# EAGLE board x-OSC Gloves_v2 (EAGLE 6.4)
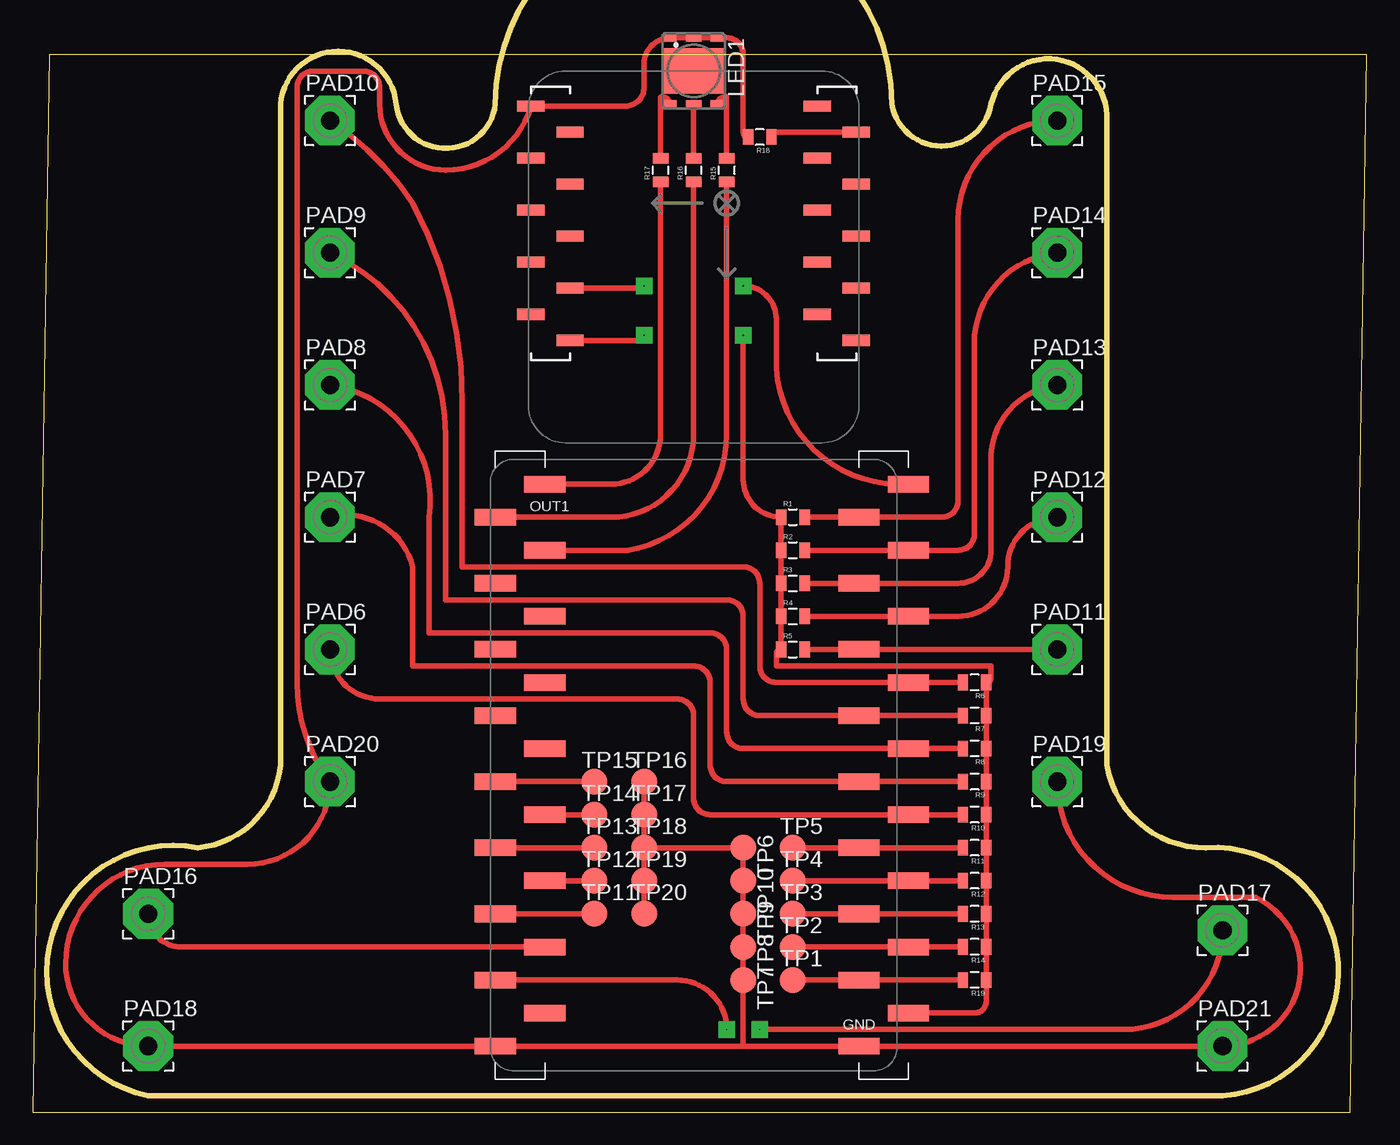
[diagram p0: board, top side]
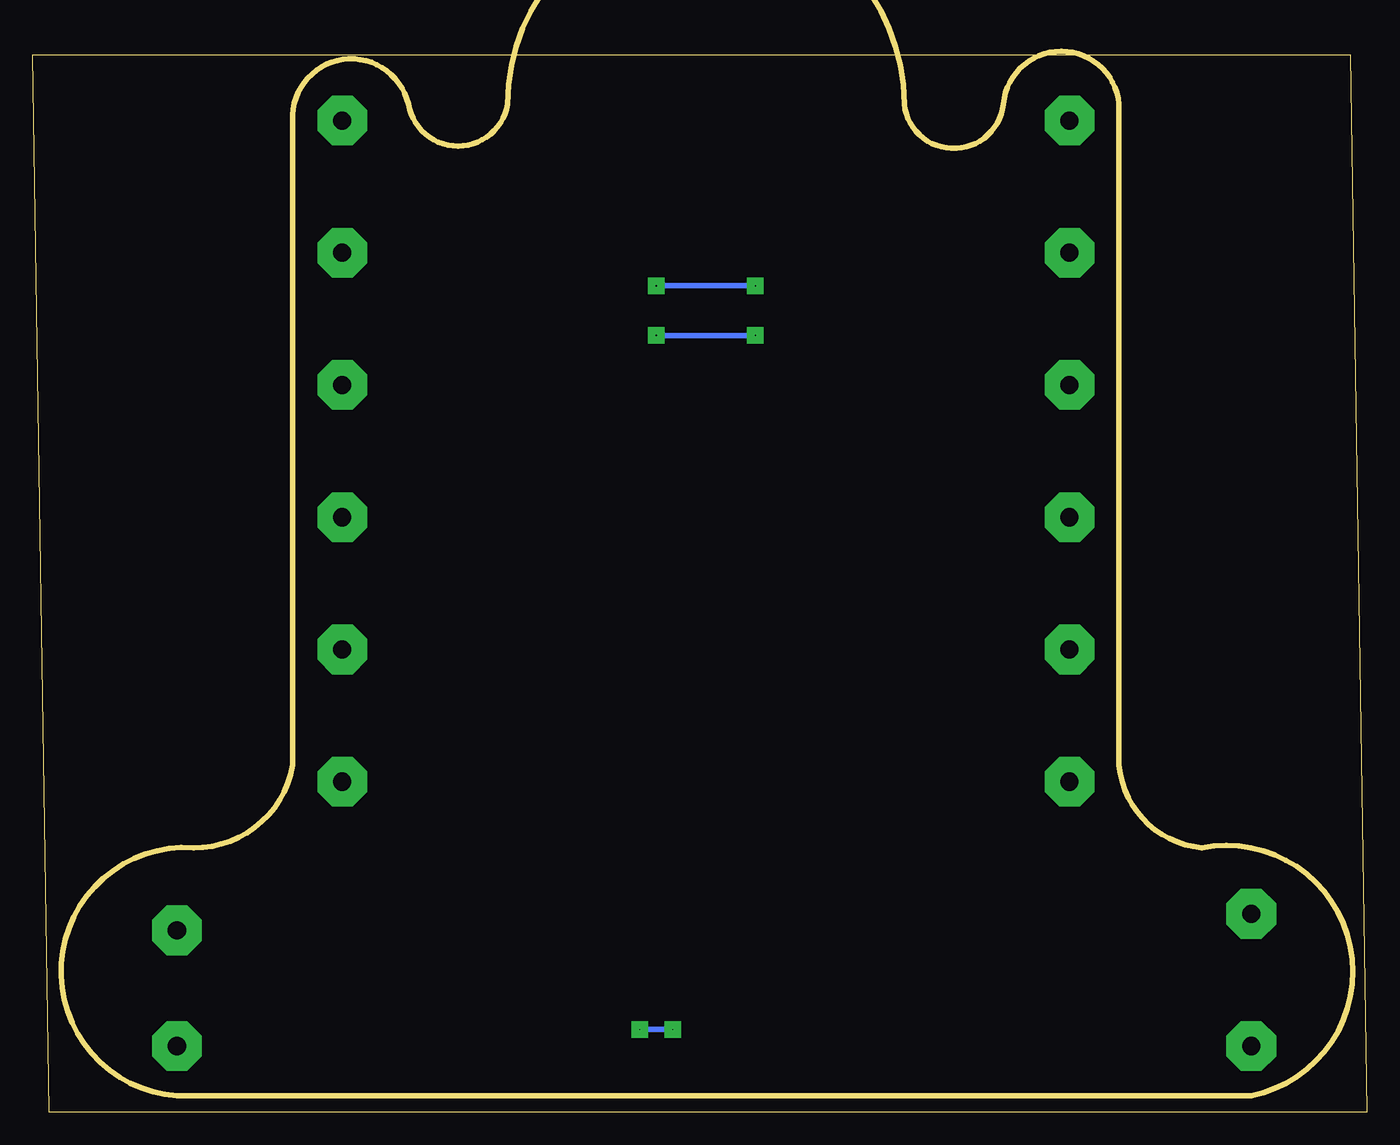
[diagram p1: board, bottom side, seen from below]

Size 102.54 x 81.27 mm. Coordinates in mm from the lower left corner, seen from the top.
Outline: 0,0 101.27,0 102.54,81.27 1.27,81.27 0,0
Copper layers (1*16): Top 0.035mm / dielectric 1.5mm / Bottom 0.035mm
Design rules "default": minimum track width 10mil, minimum drill 24mil, track to track 8mil, track to pad 8mil, pad to pad 8mil, via to via 8mil, smd to smd 8mil, copper to edge 40mil, drill to drill 8mil, minimum pad ring 10mil, minimum via ring 8mil, stop-mask expansion 4mil, vias tented up to drill 0mil, thermal gap 10mil
Milling: 12 lines

## Footprints (pad centres in the part's own frame; a part is rotated, then mirrored left to right if it is on the bottom)
F50360 = smd 0.6 x 1.05: BA 2.55,1.825; BC -2.55,1.825; RA 2.55,-1.825; RC -2.55,-1.825 | smd 0.6 x 1.2: GA 2.55,0; GC -2.55,0 | smd 3.5 x 4.7: NC 0,0
3,81/1,4 = drill 1.397 pad 3.81 octagon: 1 0,0
0805 = smd 0.8 x 1.2: 1 -0.9,0; 2 0.9,0
TP20R = smd 2 x 2: TP 0,0
X-OSC_SMD = smd 3.17 x 1.27: GND 12.7,-21.59; GND@1 -15.24,-21.59; IN1 16.51,21.59; IN2 12.7,19.05; IN3 16.51,16.51; IN4 12.7,13.97; IN5 16.51,11.43; IN6 12.7,8.89; IN7 16.51,6.35; IN8 12.7,3.81; IN9 16.51,1.27; IN10 12.7,-1.27; IN11 16.51,-3.81; IN12 12.7,-6.35; IN13 16.51,-8.89; IN14 12.7,-11.43; IN15 16.51,-13.97; IN16 12.7,-16.51; OUT1 -11.43,21.59; OUT2 -15.24,19.05; OUT3 -11.43,16.51; OUT4 -15.24,13.97; OUT5 -11.43,11.43; OUT6 -15.24,8.89; OUT7 -11.43,6.35; OUT8 -15.24,3.81; OUT9 -11.43,1.27; OUT10 -15.24,-1.27; OUT11 -11.43,-3.81; OUT12 -15.24,-6.35; OUT13 -11.43,-8.89; OUT14 -15.24,-11.43; OUT15 -11.43,-13.97; OUT16 -15.24,-16.51; VBATT -11.43,-19.05; VOUT 16.51,-19.05
X-BIMU_SMD = smd 2.1 x 0.85: 1 9.5,8; 2 12.5,6; 3 9.5,4; 4 12.5,2; 5 9.5,0; 6 12.5,-2; 7 9.5,-4; 8 12.5,-6; 9 9.5,-8; 10 12.5,-10; 11 -9.5,-10; 12 -12.5,-8; 13 -9.5,-6; 14 -12.5,-4; 15 -9.5,-2; 16 -12.5,0; 17 -9.5,2; 18 -12.5,4; 19 -9.5,6; 20 -12.5,8

## Placement (x,y rotation side)
LED1  F50360  [F50360]  50.8,80.01 270 top
PAD6  [3,81/1,4]  22.86,35.56 0 top
PAD7  [3,81/1,4]  22.86,45.72 0 top
PAD8  [3,81/1,4]  22.86,55.88 0 top
PAD9  [3,81/1,4]  22.86,66.04 0 top
PAD10  [3,81/1,4]  22.86,76.2 0 top
PAD11  [3,81/1,4]  78.74,35.56 0 top
PAD12  [3,81/1,4]  78.74,45.72 0 top
PAD13  [3,81/1,4]  78.74,55.88 0 top
PAD14  [3,81/1,4]  78.74,66.04 0 top
PAD15  [3,81/1,4]  78.74,76.2 0 top
PAD16  [3,81/1,4]  8.89,15.24 0 top
PAD17  [3,81/1,4]  91.44,13.97 0 top
PAD18  [3,81/1,4]  8.89,5.08 0 top
PAD19  [3,81/1,4]  78.74,25.4 0 top
PAD20  [3,81/1,4]  22.86,25.4 0 top
PAD21  [3,81/1,4]  91.44,5.08 0 top
R1  [0805]  58.42,45.72 0 top
R2  [0805]  58.42,43.18 0 top
R3  [0805]  58.42,40.64 0 top
R4  [0805]  58.42,38.1 0 top
R5  [0805]  58.42,35.56 0 top
R6  [0805]  72.39,33.02 180 top
R7  [0805]  72.39,30.48 180 top
R8  [0805]  72.39,27.94 180 top
R9  [0805]  72.39,25.4 180 top
R10  [0805]  72.39,22.86 180 top
R11  [0805]  72.39,20.32 180 top
R12  [0805]  72.39,17.78 180 top
R13  [0805]  72.39,15.24 180 top
R14  [0805]  72.39,12.7 180 top
R15  [0805]  53.34,72.39 90 top
R16  [0805]  50.8,72.39 90 top
R17  [0805]  48.26,72.39 90 top
R18  [0805]  55.88,74.93 180 top
R19  [0805]  72.39,10.16 180 top
TP1  TPTP20R  [TP20R]  58.42,10.16 0 top
TP2  TPTP20R  [TP20R]  58.42,12.7 0 top
TP3  TPTP20R  [TP20R]  58.42,15.24 0 top
TP4  TPTP20R  [TP20R]  58.42,17.78 0 top
TP5  TPTP20R  [TP20R]  58.42,20.32 0 top
TP6  TPTP20R  [TP20R]  54.61,20.32 270 top
TP7  TPTP20R  [TP20R]  54.61,10.16 270 top
TP8  TPTP20R  [TP20R]  54.61,12.7 270 top
TP9  TPTP20R  [TP20R]  54.61,15.24 270 top
TP10  TPTP20R  [TP20R]  54.61,17.78 270 top
TP11  TPTP20R  [TP20R]  43.18,15.24 0 top
TP12  TPTP20R  [TP20R]  43.18,17.78 0 top
TP13  TPTP20R  [TP20R]  43.18,20.32 0 top
TP14  TPTP20R  [TP20R]  43.18,22.86 0 top
TP15  TPTP20R  [TP20R]  43.18,25.4 0 top
TP16  TPTP20R  [TP20R]  46.99,25.4 0 top
TP17  TPTP20R  [TP20R]  46.99,22.86 0 top
TP18  TPTP20R  [TP20R]  46.99,20.32 0 top
TP19  TPTP20R  [TP20R]  46.99,17.78 0 top
TP20  TPTP20R  [TP20R]  46.99,15.24 0 top
U$4  X-OSC  [X-OSC_SMD]  50.8,26.67 0 top
U$5  X-BIMU  [X-BIMU_SMD]  50.8,67.31 180 top

## Library data of the parts
LED1 = led
PAD6-PAD21 = wirepad
R1-R19 = SparkFun-Passives
TP1-TP20 = testpad
U$4 U$5 = x-io

## Nets
GND: LED1.BC LED1.GC LED1.RC PAD18.1 PAD19.1 PAD20.1 PAD21.1 R18.2 TP6.TP TP7.TP TP8.TP TP9.TP TP10.TP TP16.TP TP17.TP TP18.TP TP19.TP TP20.TP U$4.GND U$4.GND@1 U$5.10
N$1: LED1.BA R15.2
N$2: LED1.GA R16.2
N$3: R15.1 U$4.OUT3
N$4: PAD15.1 R1.2 U$4.IN2
N$5: R16.1 U$4.OUT2
N$6: PAD14.1 R2.2 U$4.IN3
N$7: PAD13.1 R3.2 U$4.IN4
N$8: PAD12.1 R4.2 U$4.IN5
N$9: PAD11.1 R5.2 U$4.IN6
N$10: R18.1 U$5.12
N$11: U$4.IN1 U$5.3
N$12: PAD10.1 R6.2 U$4.IN7
N$13: PAD9.1 R7.2 U$4.IN8
N$14: PAD8.1 R8.2 U$4.IN9
N$15: PAD7.1 R9.2 U$4.IN10
N$16: PAD6.1 R10.2 U$4.IN11
N$17: LED1.RA R17.2
N$18: R11.2 TP5.TP U$4.IN12
N$19: R12.2 TP4.TP U$4.IN13
N$20: R13.2 TP3.TP U$4.IN14
N$21: R14.2 TP2.TP U$4.IN15
N$22: R19.2 TP1.TP U$4.IN16
N$23: PAD16.1 U$4.OUT15
N$24: PAD17.1 U$4.OUT16
N$25: R17.1 U$4.OUT1
N$26: TP11.TP U$4.OUT14
N$29: TP12.TP U$4.OUT13
N$30: TP13.TP U$4.OUT12
N$31: TP14.TP U$4.OUT11
N$32: TP15.TP U$4.OUT10
VDD: R1.1 R2.1 R3.1 R4.1 R5.1 R6.1 R7.1 R8.1 R9.1 R10.1 R11.1 R12.1 R13.1 R14.1 R19.1 U$4.VOUT U$5.1

## Tracks (layer width: path | path; a pad name or v marks a point on that pad's centre or on a via)
GND
  Top 0.406: 71.12,5.08 U$4.GND | 54.61,5.08 U$4.GND@1 PAD18.1 arc-90 2.54,11.43 arc-90 10.16,19.05 16.51,19.05 arc90 PAD20.1 arc-37 20.32,33.02 20.32,78.74 arc-90 21.59,80.01 25.4,80.01 arc-90 26.67,78.74 26.67,77.47 arc90 31.75,72.39 arc74 U$5.10 45.56,77.31 arc90 46.99,78.74 46.99,80.58 arc-90 LED1.RC LED1.GC LED1.BC 53.33,82.56 arc-90 54.61,81.28 54.61,75.3 arc90 R18.2 | 54.61,5.08 U$4.GND | U$4.GND PAD21.1 arc155 93.98,16.51 87.63,16.51 arc-90 PAD19.1 | 54.61,5.08 TP7.TP TP8.TP TP9.TP TP10.TP TP6.TP TP18.TP | TP18.TP TP17.TP TP16.TP TP18.TP | TP18.TP TP19.TP TP20.TP
N$1
  Top 0.406: LED1.BA arc-90 53.34,78.02 R15.2
N$2
  Top 0.406: LED1.GA R16.2
N$3
  Top 0.406: R15.1 53.34,52.07 arc-81 45.72,43.18 U$4.OUT3
N$4
  Top 0.406: R1.2 U$4.IN2 69.85,45.72 arc90 71.12,46.99 71.12,68.58 arc-90 PAD15.1
N$5
  Top 0.406: R16.1 50.8,52.07 arc-90 44.45,45.72 U$4.OUT2
N$6
  Top 0.406: R2.2 U$4.IN3 71.12,43.18 arc90 72.39,44.45 72.39,58.42 arc-90 PAD14.1
N$7
  Top 0.406: R3.2 U$4.IN4 71.12,40.64 arc90 73.66,43.18 73.66,49.53 arc-90 PAD13.1
N$8
  Top 0.406: R4.2 U$4.IN5 71.12,38.1 arc90 74.93,41.91 arc-90 PAD12.1
N$9
  Top 0.406: R5.2 U$4.IN6 PAD11.1
N$10
  Top 0.406: U$5.12 57.16,75.31 arc90 R18.1
N$11  (via drill 0.1 pad 1.27)
  Top 0.406: U$5.3 46.99,63.31 v46.99,63.5 | v54.61,63.5 arc-90 57.15,60.96 57.15,57.15 arc90 U$4.IN1
  Bottom 0.406: v46.99,63.5 v54.61,63.5
N$12
  Top 0.406: R6.2 U$4.IN7 57.15,33.02 arc-90 55.88,34.29 55.88,40.64 arc90 54.61,41.91 33.02,41.91 33.02,54.61 arc28 29.21,69.85 arc23 PAD10.1
N$13
  Top 0.406: R7.2 U$4.IN8 55.88,30.48 arc-90 54.61,31.75 54.61,38.1 arc90 53.34,39.37 31.75,39.37 31.75,52.07 arc65 PAD9.1
N$14
  Top 0.406: R8.2 U$4.IN9 54.61,27.94 arc-90 53.34,29.21 53.34,35.56 arc90 52.07,36.83 30.48,36.83 30.48,45.72 arc90 PAD8.1
N$15
  Top 0.406: R9.2 U$4.IN10 53.34,25.4 arc-90 52.07,26.67 52.07,33.02 arc90 50.8,34.29 29.21,34.29 29.21,41.91 arc90 PAD7.1
N$16
  Top 0.406: R10.2 U$4.IN11 52.07,22.86 arc-90 50.8,24.13 50.8,30.48 arc90 49.53,31.75 26.67,31.75 arc-90 PAD6.1
N$17
  Top 0.406: LED1.RA arc90 48.26,78.02 R17.2
N$18
  Top 0.406: R11.2 U$4.IN12 TP5.TP
N$19
  Top 0.406: R12.2 U$4.IN13 TP4.TP
N$20
  Top 0.406: R13.2 U$4.IN14 TP3.TP
N$21
  Top 0.406: R14.2 U$4.IN15 TP2.TP
N$22
  Top 0.406: R19.2 U$4.IN16 TP1.TP
N$23
  Top 0.406: PAD16.1 arc90 11.43,12.7 U$4.OUT15
N$24  (via drill 0.03 pad 1.27)
  Top 0.406: v55.88,6.35 83.82,6.35 arc90 PAD17.1 | U$4.OUT16 49.53,10.16 | 49.53,10.16 arc-90 v53.34,6.35 arc90 49.53,10.16
  Bottom 0.406: v53.34,6.35 v55.88,6.35
N$25
  Top 0.406: R17.1 48.26,52.07 arc-90 44.45,48.26 U$4.OUT1
N$26
  Top 0.406: TP11.TP U$4.OUT14
N$28  (via drill 0.03 pad 1.27)
  other vias: 55.88,6.35
N$29
  Top 0.406: TP12.TP U$4.OUT13
N$30
  Top 0.406: TP13.TP U$4.OUT12
N$31
  Top 0.406: TP14.TP U$4.OUT11
N$32
  Top 0.406: TP15.TP U$4.OUT10
N$34  (via drill 0.1 pad 1.27)
  other vias: 46.99,63.5
N$35  (via drill 0.1 pad 1.27)
  other vias: 46.99,59.69
N$36  (via drill 0.1 pad 1.27)
  other vias: 54.61,59.69
N$37  (via drill 0.1 pad 1.27)
  other vias: 54.61,63.5
VDD  (via drill 0.1 pad 1.27)
  Top 0.406: U$4.VOUT 72.39,7.62 arc90 73.29,8.52 R19.1 R14.1 R13.1 R12.1 R11.1 R10.1 R9.1 R8.1 R7.1 R6.1 arc90 73.66,33.39 73.66,34.29 57.15,34.29 57.15,35.19 arc-90 R5.1 R4.1 R3.1 R2.1 R1.1 arc-90 54.61,48.63 v54.61,59.69 | U$5.1 46.61,59.31 arc90 v46.99,59.69
  Bottom 0.406: v46.99,59.69 v54.61,59.69